# Altium PCB iso_simucam.PcbDoc (part 3 of 4)
Units mil, origin at the board's own origin, x right, y up, seen from the top; angles counter-clockwise.
Board outline 2600 x 5120 mil, 2 copper layers (Top Layer, Bottom Layer); 384 components, 206 nets, 1336 pads, 508 vias.
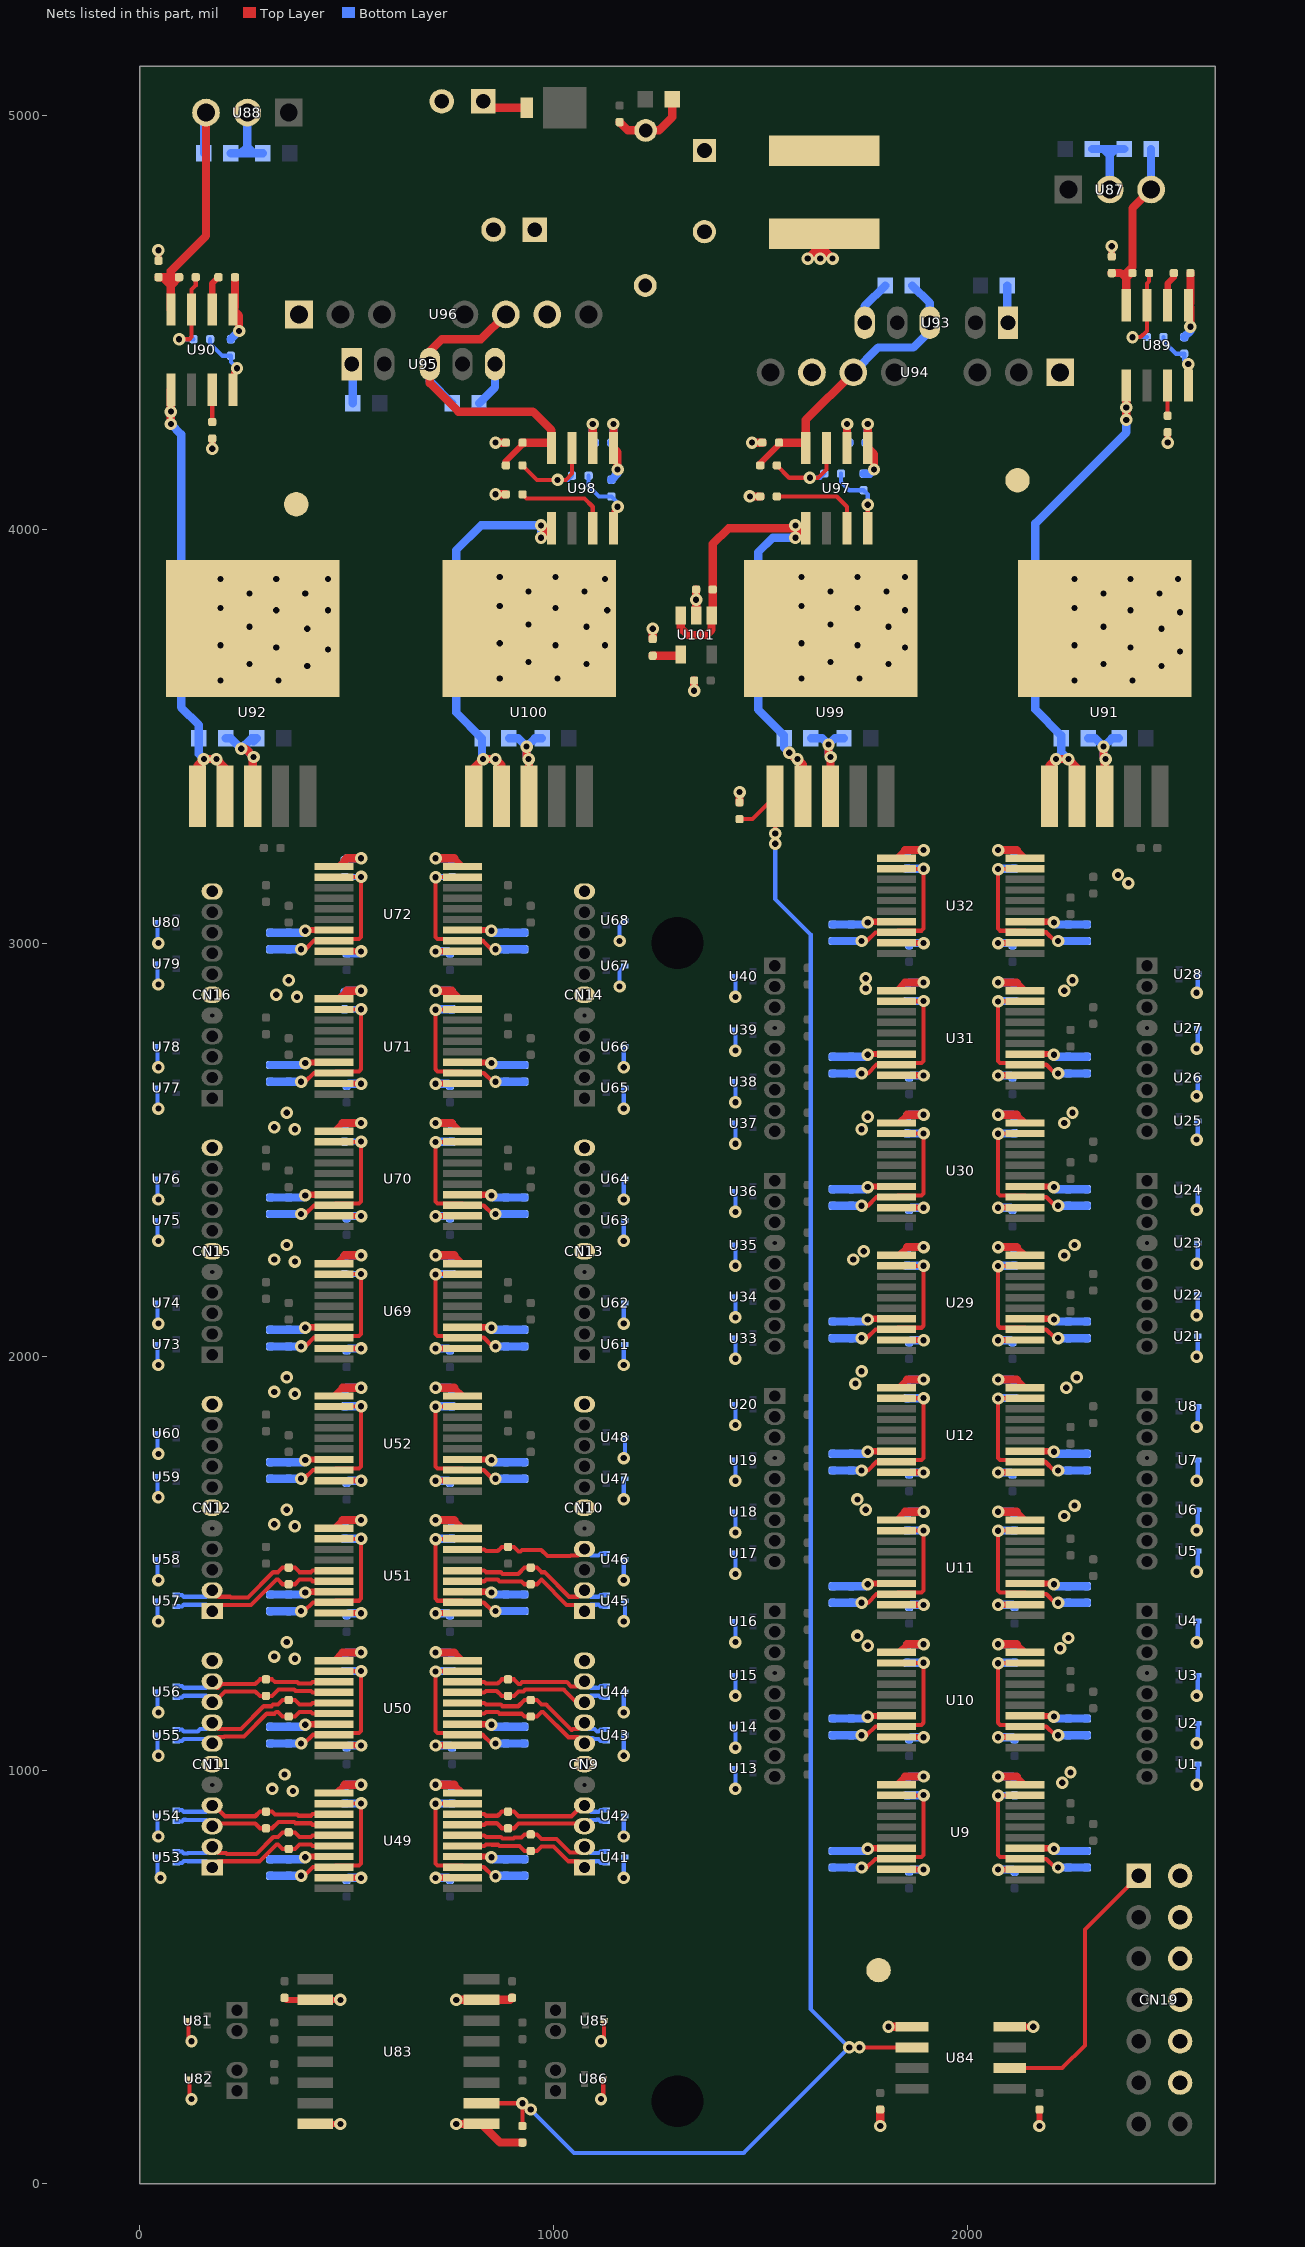
[diagram p3: the nets of this part, all layers, seen from the top]

## Via types
v1: diameter 30, hole 15, Top Layer to Bottom Layer, tented both sides, 508 vias

## Nets (pads, with @x,y where several pads share a name; then routed paths per layer and width w, separated by ;. In a path a pad name is that pad's centre, name@x,y a point inside that pad or via, vN(x,y) a via of type N, cw(c..) or ccw(c..) an arc to the next point about the centre after c; other vN are vias at no path point) (continued)
GND: C1.1 C2.1 C3.1 C4.1 C5.1 C6.1 C7.1 C8.1 C9.2 C10.2 C11.2 C12.2 C13.1 C14.1 C15.1 C16.1 C33.1 C34.1 C35.1 C36.1 C37.1 C38.1 C39.1 C40.1 C41.2 C42.2 C43.2 C44.2 C45.1 C46.1 C47.1 C48.1 C81.1 C82.1 C83.1 C84.1 C85.1 C86.1 C87.1 C88.1 C89.1 C90.1 C91.1 C92.1 C93.1 C94.1 C95.1 C96.1 C113.1 C114.1 C115.1 C116.1 C117.1 C118.1 C119.1 C120.1 C121.1 C122.1 C123.1 C124.1 C125.1 C126.1 C127.1 C128.1 C129.1 C130.2 C133.1 C134.1 C135.1 C136.1 C137.1 C138.1 C139.1 C140.1 C141.1 C142.1 C143.1 C144.1 C145.1 C146.1 C147.1 C148.1 C149.1 C150.1 CN11.6 CN11.11 CN12.6 CN12.11 CN15.6 CN15.11 CN16.6 CN16.11 CN19.2 CN19.4 CN19.6 CN19.8 CN19.10 CN19.12 CN22.2 FD1.0 FD2.0 R74.1 R75.1 R76.1 R77.1 R79.2 U1.3 U2.3 U3.3 U4.3 U5.3 U6.3 U7.3 U8.3 U9.2 U9.4 U9.10 U10.2 U10.4 U10.10 U11.2 U11.4 U11.10 U12.2 U12.4 U12.10 U21.3 U22.3 U23.3 U24.3 U25.3 U26.3 U27.3 U28.3 U29.2 U29.4 U29.10 U30.2 U30.4 U30.10 U31.2 U31.4 U31.10 U32.2 U32.4 U32.10 U49.11 U49.17 U49.19 U50.11 U50.17 U50.19 U51.11 U51.17 U51.19 U52.11 U52.17 U52.19 U53.3 U54.3 U55.3 U56.3 U57.3 U58.3 U59.3 U60.3 U69.11 U69.17 U69.19 U70.11 U70.17 U70.19 U71.11 U71.17 U71.19 U72.11 U72.17 U72.19 U73.3 U74.3 U75.3 U76.3 U77.3 U78.3 U79.3 U80.3 U81.3 U82.3 U83.2 U83.8 U84.4 U87.2 U88.2 U89.1 U90.1 U91.3 U91.6 U92.3 U92.6 U93.1 U94.1 U95.1 U96.1 | length 9818.5
  Top Layer w10: U81.3@117.36,395 117.36,352.64 v1(125,345) ; U82.3@119.72,253.78 119.72,210.28 v1(125,205) ; U72.11@469.49,3185.16 U72.11@480.16,3185.16
  Top Layer w15: C140.1@45,4650.08 v1(45,4675) ; v1(175,4195) R77.1@175,4219.92 ; C129.1@350,449.92 354.92,445 U83.2@424.21,445 v1(485,445) ; v1@395.08,785.08 v1(400,790) 401.61,791.61 U49.17@469.49,791.61 ; v1@395.08,1105.08 v1(400,1110) 401.61,1111.61 U50.17@469.49,1111.61 ; v1@395.08,1425.08 v1(400,1430) 401.61,1431.61 U51.17@469.49,1431.61 ; v1@395.08,1745.08 v1(400,1750) 401.61,1751.61 U52.17@469.49,1751.61 ; v1@395.08,2065.08 v1(400,2070) 401.18,2071.18 U69.17@469.49,2071.18 ; v1@395.08,2385.08 v1(400,2390) 401.61,2391.61 U70.17@469.49,2391.61 ; v1@395.08,2705.08 v1(400,2710) 401.61,2711.61 U71.17@469.49,2711.61 ; v1@395.08,3025.08 v1(400,3030) 401.61,3031.61 U72.17@469.49,3031.61 ; U83.8@424.21,145 v1(485,145) ; U49.19@469.49,740.43 534.57,740.43 v1(535,740) ; U49.11@469.49,945.16 475.16,945.16 495,965 ; U50.19@469.49,1060.43 534.57,1060.43 v1(535,1060) ; U50.11@469.49,1265.16 489.33,1285 490,1285 ; U51.19@469.49,1380.43 534.57,1380.43 v1(535,1380) ; U51.11@469.49,1585.16 489.33,1605 490,1605 ; U52.19@469.49,1700.43 534.57,1700.43 v1(535,1700) ; U52.11@469.49,1905.16 489.33,1925 490,1925 ; U69.19@469.49,2020 v1(535,2020) ; U69.11@469.49,2224.72 474.72,2224.72 495,2245 ; U70.19@469.49,2340.43 534.57,2340.43 v1(535,2340) ; U70.11@469.49,2545.16 489.33,2565 490,2565 ; U71.19@469.49,2660.43 534.57,2660.43 v1(535,2660) ; U71.11@469.49,2865.16 480.16,2865.16 500,2885 ; U72.19@469.49,2980.43 534.57,2980.43 v1(535,2980) ; U72.11@480.16,3185.16 495,3200 ; v1(2075,760) 2075.43,760.43 U9.2@2140.51,760.43 ; v1(2075,1080) 2075.43,1080.43 U10.2@2140.51,1080.43 ; v1(2075,1400) 2075.43,1400.43 U11.2@2140.51,1400.43 ; v1(2075,1720) 2075.43,1720.43 U12.2@2140.51,1720.43 ; v1(2075,2040) 2075.43,2040.43 U29.2@2140.51,2040.43 ; v1(2075,2360) 2075.43,2360.43 U30.2@2140.51,2360.43 ; v1(2075,2680) 2075.43,2680.43 U31.2@2140.51,2680.43 ; v1(2075,3000) 2075.59,3000.59 U32.2@2140.51,3000.59 ; U84.4@2103.11,380 v1(2160,380) ; 2120,985 2139.84,965.16 U9.10@2140.51,965.16 ; 2120,1305 2120.67,1305 U10.10@2140.51,1285.16 ; 2120,1625 2120.67,1625 U11.10@2140.51,1605.16 ; 2120,1945 2120.67,1945 U12.10@2140.51,1925.16 ; 2120,2265 2120.67,2265 U29.10@2140.51,2245.16 ; 2120,2585 2120.67,2585 U30.10@2140.51,2565.16 ; 2120,2905 2120.67,2905 U31.10@2140.51,2885.16 ; 2120,3225 2120,3225.83 U32.10@2140.51,3205.31 ; U9.4@2140.51,811.61 2203.39,811.61 v1@2210,805 ; U10.4@2140.51,1131.61 2203.39,1131.61 v1@2209.92,1125.08 ; U11.4@2140.51,1451.61 2203.39,1451.61 v1@2209.92,1445.08 ; U12.4@2140.51,1771.61 2203.39,1771.61 v1@2209.92,1765.08 ; U29.4@2140.51,2091.61 2203.39,2091.61 v1@2209.92,2085.08 ; U30.4@2140.51,2411.61 2203.39,2411.61 v1@2209.92,2405.08 ; U31.4@2140.51,2731.61 2203.39,2731.61 v1@2209.92,2725.08 ; U32.4@2140.51,3051.77 2203.23,3051.77 v1@2209.92,3045.08 ; v1(2175,140) C130.2@2175,179.92 ; C139.1@2350,4660.08 v1(2350,4685) ; v1(2485,4210) R76.1@2485,4234.92
  Top Layer w20: C138.1@230.08,4610 230.08,4537.08 U90.1@225,4532 240,4517 v1(240,4480) ; v1(245,3470) 255,3470 v1(275,3450) 273,3448 U92.3@273,3354.97 ; 490,1285 v1(535,1285) ; 490,1605 v1(535,1605) ; 490,1925 v1(535,1925) ; 490,2565 v1(535,2565) ; 495,965 v1(535,965) ; 495,2245 v1(535,2245) ; 495,3200 500,3205 v1(535,3205) ; 500,2885 v1(535,2885) ; C142.1@1160,4984.92 1179.92,4965 R79.2@1223,4965 1255,4965 1287.48,4997.48 C141.1@1287.48,5040 ; v1(2075,985) 2120,985 ; v1(2075,1305) 2120,1305 ; v1(2075,1625) 2120,1625 ; v1(2075,1945) 2120,1945 ; v1(2075,2265) 2120,2265 ; v1(2075,2585) 2120,2585 ; v1(2075,2905) 2120,2905 ; v1(2075,3225) 2120,3225 ; v1(2330,3475) 2330,3450 v1(2335,3445) 2333,3443 U91.3@2333,3354.97 ; v1(2540,4490) 2540,4537 U89.1@2535,4542 2540.08,4547.08 C137.1@2540.08,4620
  Bottom Layer w10: U53.3@42.36,790 42.36,747.64 v1(50,740) ; U54.3@42.36,890 42.36,842.64 v1(45,840) ; U55.3@42.36,1085 42.36,1037.64 v1(45,1035) ; U56.3@42.36,1190 42.36,1142.64 v1(45,1140) ; U57.3@42.36,1410 42.36,1362.64 v1(45,1360) ; U58.3@42.36,1510 42.36,1462.64 v1(45,1460) ; U59.3@42.36,1710 42.36,1662.64 v1(45,1660) ; U60.3@42.36,1815 42.36,1767.64 v1(45,1765) ; U73.3@42.36,2030 42.36,1982.64 v1(45,1980) ; U74.3@42.36,2130 42.36,2082.64 v1(45,2080) ; U75.3@42.36,2330 42.36,2282.64 v1(45,2280) ; U76.3@42.36,2430 42.36,2382.64 v1(45,2380) ; U77.3@42.36,2650 42.36,2602.64 v1(45,2600) ; U78.3@42.36,2750 42.36,2702.64 v1(45,2700) ; U79.3@42.36,2950 42.36,2902.64 v1(45,2900) ; U80.3@42.36,3050 42.36,3002.64 v1(45,3000) ; v1(2555,965) 2557.64,967.64 U1.3@2557.64,1015 ; v1(2555,1065) 2557.64,1067.64 U2.3@2557.64,1113.78 ; v1(2555,1180) 2557.64,1182.64 U3.3@2557.64,1230 ; v1(2555,1310) 2557.64,1312.64 U4.3@2557.64,1361.22 ; v1(2555,1480) 2557.64,1482.64 U5.3@2557.64,1530 ; v1(2555,1580) 2557.64,1582.64 U6.3@2557.64,1630 ; v1(2555,1700) 2557.64,1702.64 U7.3@2557.64,1750 ; v1(2555,1830) 2557.64,1832.64 U8.3@2557.64,1880 ; v1(2555,2000) 2557.64,2002.64 U21.3@2557.64,2050 ; v1(2555,2100) 2557.64,2102.64 U22.3@2557.64,2150 ; v1(2555,2225) 2557.64,2227.64 U23.3@2557.64,2275 ; v1(2555,2355) 2557.64,2357.64 U24.3@2557.64,2403.78 ; v1(2555,2525) 2557.64,2527.64 U25.3@2557.64,2570 ; v1(2555,2630) 2557.64,2632.64 U26.3@2557.64,2675 ; v1(2555,2745) 2557.64,2747.64 U27.3@2557.64,2793.78 ; v1(2555,2880) 2557.64,2882.64 U28.3@2557.64,2925
  Bottom Layer w20: C144.1@207.48,3495 220,3495 v1(245,3470) ; C136.1@219.96,4910 245,4910 ; R75.1@220,4460.16 220.16,4460.16 v1(240,4480) ; U88.2@260,5008 260,4925 ; v1(275,3450) 255,3470 v1(245,3470) ; C146.1@275,3487.48 C146.1@282.52,3495 270,3495 v1(245,3470) ; C134.1@297.52,4910 275,4910 ; C93.1@315,785.16 359.92,785.16 C89.1@360,785.08 395.08,785.08 v1(400,790) ; C94.1@315,1105.08 C90.1@360,1105.08 395.08,1105.08 v1(400,1110) ; C95.1@315,1425.08 C91.1@360,1425.08 395.08,1425.08 v1(400,1430) ; C96.1@315,1745.16 359.92,1745.16 C92.1@360,1745.08 395.08,1745.08 v1(400,1750) ; C125.1@315,2065.08 C121.1@360,2065.08 395.08,2065.08 v1(400,2070) ; C126.1@315,2385.16 359.92,2385.16 C122.1@360,2385.08 395.08,2385.08 v1(400,2390) ; C127.1@315,2705.08 C123.1@360,2705.08 395.08,2705.08 v1(400,2710) ; C128.1@315,3025.08 C124.1@360,3025.08 395.08,3025.08 v1(400,3030) ; C85.1@495,960.08 499.92,965 v1(535,965) ; C86.1@495,1280.08 499.92,1285 v1(535,1285) ; C87.1@495,1600.16 499.84,1605 v1(535,1605) ; C88.1@495,1920.16 499.84,1925 v1(535,1925) ; C117.1@495,2240.08 499.92,2245 v1(535,2245) ; C118.1@495,2560.16 499.84,2565 v1(535,2565) ; C119.1@495,2880 500,2885 v1(535,2885) ; C120.1@495,3200.08 499.92,3205 v1(535,3205) ; C81.1@500,735.08 504.92,740 v1(535,740) ; C82.1@500,1055.08 504.92,1060 v1(535,1060) ; C83.1@500,1375.08 504.92,1380 v1(535,1380) ; C84.1@500,1695.16 504.84,1700 v1(535,1700) ; C113.1@500,2015.08 504.92,2020 v1(535,2020) ; C114.1@500,2335.08 504.92,2340 v1(535,2340) ; C115.1@500,2655.16 504.84,2660 v1(535,2660) ; C116.1@500,2975.08 530.08,2975.08 v1(535,2980) ; U95.1@512.28,4400 515.04,4397.24 C150.1@515.04,4305 ; v1(2075,760) 2110.08,760 C9.2@2115,755.08 ; v1(2075,985) 2110,985 C13.1@2115,980 ; v1(2075,1080) 2110,1080 C10.2@2115,1075 ; v1(2075,1305) 2110.08,1305 C14.1@2115,1300.08 ; v1(2075,1400) 2110,1400 C11.2@2115,1395 ; v1(2075,1625) 2110.08,1625 C15.1@2115,1620.08 ; v1(2075,1720) 2105,1720 C12.2@2110,1715 ; v1(2075,1945) 2110.16,1945 C16.1@2115,1940.16 ; v1(2075,2040) 2105.08,2040 C41.2@2110,2035.08 ; v1(2075,2265) 2110.08,2265 C45.1@2115,2260.08 ; v1(2075,2360) 2105.08,2360 C42.2@2110,2355.08 ; v1(2075,2585) 2110.08,2585 C46.1@2115,2580.08 ; v1(2075,2680) 2105.08,2680 C43.2@2110,2675.08 ; v1(2075,2905) 2110.08,2905 C47.1@2115,2900.08 ; v1(2075,3000) 2105.08,3000 C44.2@2110,2995.08 ; v1(2075,3225) 2110.08,3225 C48.1@2115,3220.08 ; C149.1@2097.48,4590 2097.48,4501.5 U93.1@2098.98,4500 ; v1(2210,810) 2215,805 C5.1@2245,805 2245.08,805.08 C1.1@2290,805.08 ; v1(2210,1130) 2214.92,1125.08 C6.1@2245,1125.08 2245.08,1125.16 C2.1@2290,1125.16 ; v1(2210,1450) 2214.92,1445.08 C7.1@2245,1445.08 C3.1@2290,1445.08 ; v1(2210,1770) 2214.92,1765.08 C8.1@2245,1765.08 C4.1@2290,1765.08 ; v1(2210,2090) 2214.92,2085.08 C37.1@2245,2085.08 C33.1@2290,2085.08 ; v1(2210,2410) 2214.92,2405.08 C38.1@2245,2405.08 C34.1@2290,2405.08 ; v1(2210,2730) 2214.92,2725.08 C39.1@2245,2725.08 C35.1@2290,2725.08 ; v1(2210,3050) 2214.92,3045.08 C40.1@2245,3045.08 C36.1@2290,3045.08 ; C143.1@2292.48,3495 2310,3495 v1(2330,3475) ; C133.1@2302.48,4920 2330,4920 ; v1(2335,3445) 2330,3450 v1(2330,3475) ; U87.2@2345,4822 2345,4905 ; C145.1@2367.52,3495 2350,3495 v1(2330,3475) ; C135.1@2380,4920 2360,4920 ; R74.1@2525,4465.08 2540,4480.08 v1(2540,4490) ; 245,4910 260,4925 ; 245,4910 275,4910 ; 260,4925 275,4910 ; 2330,4920 2345,4905 ; 2330,4920 2360,4920 ; 2345,4905 2360,4920
  other v1: 370,950 320,955 2230,970 350,990 2250,995 375,1270 325,1275 2225,1295 355,1310 2245,1320 375,1590 325,1595 2235,1615 355,1630 2260,1640 375,1910 325,1915 2240,1925 355,1950 2265,1950 375,2230 325,2235 2235,2245 355,2270 2260,2270 375,2550 325,2555 2235,2565 355,2590 2255,2590 380,2870 330,2875 2235,2885 360,2910 2255,2910 2390,3145 2365,3165 195,3635 335,3635 2260,3635 2400,3635 405,3670 2470,3670 265,3675 2330,3675 2515,3705 455,3710 330,3715 2395,3715 195,3720 2260,3720 405,3760 2470,3760 265,3765 2330,3765 2515,3800 330,3805 455,3805 2395,3805 195,3810 2260,3810 265,3845 400,3845 2330,3845 2465,3845 195,3880 330,3880 455,3880 2260,3880 2395,3880 2510,3880
GND_ISO: C17.1 C18.1 C19.1 C20.1 C21.1 C22.1 C23.1 C24.1 C25.1 C26.1 C27.1 C28.1 C29.1 C30.1 C31.1 C32.1 C49.1 C50.1 C51.1 C52.1 C53.1 C54.1 C55.1 C56.1 C57.1 C58.1 C59.1 C60.1 C61.1 C62.1 C63.1 C64.1 C65.1 C66.1 C67.1 C68.1 C69.1 C70.1 C71.1 C72.1 C73.2 C74.2 C75.2 C76.2 C77.1 C78.1 C79.1 C80.1 C97.1 C98.1 C99.1 C100.1 C101.1 C102.1 C103.1 C104.1 C105.2 C106.2 C107.2 C108.2 C109.1 C110.1 C111.1 C112.1 C131.2 C132.1 C147.2 C148.2 C151.1 C152.1 C153.1 C154.1 C155.1 C156.1 C157.1 C158.1 C159.1 C160.1 C161.1 C162.1 C163.1 CN9.6 CN9.11 CN10.6 CN10.11 CN13.6 CN13.11 CN14.6 CN14.11 CN23.1 CN23.2 FD3.0 R67.1 R79.1 R84.1 R85.1 R86.1 R87.1 R88.2 U9.11 U9.17 U9.19 U10.11 U10.17 U10.19 U11.11 U11.17 U11.19 U12.11 U12.17 U12.19 U13.3 U14.3 U15.3 U16.3 U17.3 U18.3 U19.3 U20.3 U29.11 U29.17 U29.19 U30.11 U30.17 U30.19 U31.11 U31.17 U31.19 U32.11 U32.17 U32.19 U33.3 U34.3 U35.3 U36.3 U37.3 U38.3 U39.3 U40.3 U41.3 U42.3 U43.3 U44.3 U45.3 U46.3 U47.3 U48.3 U49.2 U49.4 U49.10 U50.2 U50.4 U50.10 U51.2 U51.4 U51.10 U52.2 U52.4 U52.10 U61.3 U62.3 U63.3 U64.3 U65.3 U66.3 U67.3 U68.3 U69.2 U69.4 U69.10 U70.2 U70.4 U70.10 U71.2 U71.4 U71.10 U72.2 U72.4 U72.10 U83.9 U83.15 U84.5 U85.3 U86.3 U93.5 U94.7 U95.5 U96.7 U97.1 U98.1 U99.3 U99.6 U100.3 U100.6 U101.2 | length 9741.3
  Top Layer w10: v1(1115,205) 1120.28,210.28 U86.3@1120.28,253.78 ; v1(1115,345) 1122.64,352.64 U85.3@1122.64,395
  Top Layer w15: v1(715,740) 715.43,740.43 U49.2@780.51,740.43 ; v1(715,1060) 715.43,1060.43 U50.2@780.51,1060.43 ; v1(715,1380) 715.43,1380.43 U51.2@780.51,1380.43 ; v1(715,1700) 715.43,1700.43 U52.2@780.51,1700.43 ; v1(715,2020) U69.2@780.51,2020 ; v1(715,2340) 715.43,2340.43 U70.2@780.51,2340.43 ; v1(715,2660) 715.43,2660.43 U71.2@780.51,2660.43 ; v1(715,2980) 715.43,2980.43 U72.2@780.51,2980.43 ; 755,2565 774.84,2545.16 U70.10@780.51,2545.16 ; 755,2885 774.84,2865.16 U71.10@780.51,2865.16 ; 760,965 760.67,965 U49.10@780.51,945.16 ; 760,1285 760.67,1285 U50.10@780.51,1265.16 ; 760,1605 760.67,1605 U51.10@780.51,1585.16 ; 760,1925 760.67,1925 U52.10@780.51,1905.16 ; 760,2245 760.24,2245 U69.10@780.51,2224.72 ; 760,3205 760.67,3205 U72.10@780.51,3185.16 ; U49.4@780.51,791.61 v1@843.39,791.61 ; U50.4@780.51,1111.61 v1@843.39,1111.61 ; U51.4@780.51,1431.61 v1@843.39,1431.61 ; U52.4@780.51,1751.61 v1@843.39,1751.61 ; U69.4@780.51,2071.18 v1@843.82,2071.18 ; U70.4@780.51,2391.61 v1@843.39,2391.61 ; U71.4@780.51,2711.61 v1@843.39,2711.61 ; U72.4@780.51,3031.61 v1@843.39,3031.61 ; v1@845,790 849.53,791.46 v1@850,791.61 ; v1@845,1110 849.53,1111.46 v1@850,1111.61 ; v1@845,1430 849.53,1431.46 v1@850,1431.61 ; v1@845,1750 849.53,1751.46 v1@850,1751.61 ; v1@845,2070 849.74,2071.12 v1@850,2071.18 ; v1@845,2390 849.53,2391.46 v1@850,2391.61 ; v1@845,2710 849.53,2711.46 v1@850,2711.61 ; v1@849.84,1425.16 v1(850,1430) ; v1@849.92,785.08 v1(850,790) ; v1@849.92,1105.08 v1(850,1110) ; v1@849.92,1745.08 v1(850,1750) ; v1@849.92,2065.08 v1(850,2070) ; v1@849.92,2385.08 v1(850,2390) ; v1@849.92,2705.08 v1(850,2710) ; v1@849.92,3025.08 v1(850,3030) v1@850,3031.61 ; v1@1755,1445 v1(1760,1450) 1761.61,1451.61 U11.17@1829.49,1451.61 ; v1@1755.08,805.08 v1(1760,810) 1761.61,811.61 U9.17@1829.49,811.61 ; v1@1755.08,1125.08 v1(1760,1130) 1761.61,1131.61 U10.17@1829.49,1131.61 ; v1@1755.08,1765.08 v1(1760,1770) 1761.61,1771.61 U12.17@1829.49,1771.61 ; v1@1755.08,2085.08 v1(1760,2090) 1761.61,2091.61 U29.17@1829.49,2091.61 ; v1@1755.08,2725.08 v1(1760,2730) 1761.61,2731.61 U31.17@1829.49,2731.61 ; v1@1755.08,3045.08 v1(1760,3050) 1761.77,3051.77 U32.17@1829.49,3051.77 ; v1@1755.16,2405.16 v1(1760,2410) 1761.61,2411.61 U30.17@1829.49,2411.61 ; U9.19@1829.49,760.43 1894.57,760.43 v1(1895,760) ; U9.11@1829.49,965.16 1830.16,965.16 1850,985 ; U10.19@1829.49,1080.43 1894.57,1080.43 v1(1895,1080) ; U10.11@1829.49,1285.16 1835.16,1285.16 1855,1305 ; U11.19@1829.49,1400.43 1894.57,1400.43 v1(1895,1400) ; U11.11@1829.49,1605.16 1849.33,1625 1850,1625 ; U12.19@1829.49,1720.43 1894.57,1720.43 v1(1895,1720) ; U12.11@1829.49,1925.16 1835.16,1925.16 1855,1945 ; U29.19@1829.49,2040.43 1894.57,2040.43 v1(1895,2040) ; U29.11@1829.49,2245.16 1835.16,2245.16 1855,2265 ; U30.19@1829.49,2360.43 1894.57,2360.43 v1(1895,2360) ; U30.11@1829.49,2565.16 1835.16,2565.16 1855,2585 ; U31.19@1829.49,2680.43 1894.57,2680.43 v1(1895,2680) ; U31.11@1829.49,2885.16 1830.16,2885.16 1850,2905 ; U32.19@1829.49,3000.59 1894.41,3000.59 v1(1895,3000) ; U32.11@1829.49,3205.31 1849.17,3225 1850,3225
  Top Layer w20: v1(715,965) 760,965 ; v1(715,1285) 760,1285 ; v1(715,1605) 760,1605 ; v1(715,1925) 760,1925 ; v1(715,2245) 760,2245 ; v1(715,2565) 755,2565 ; v1(715,2885) 755,2885 ; v1(715,3205) 760,3205 ; v1(765,145) U83.9@825.79,145 870.87,99.92 R67.1@925,99.92 ; v1(765,445) U83.15@825.79,445 895.16,445 C131.2@900,449.84 ; v1(860,4085) R87.1@884.92,4085 ; v1(860,4210) C156.1@884.92,4210 ; v1(935,3475) 935,3450 v1(940,3445) 941.14,3443.86 U100.3@941.14,3354.97 ; v1(1145,4255) U98.1@1145,4197 1155,4187 v1(1155,4145) ; C160.1@1240,3735.08 v1(1240,3760) ; v1(1340,3610) C163.1@1340,3635 ; C159.1@1344.92,3855 1344.92,3830.08 v1(1345,3830) U101.2@1345,3792.24 ; R88.2@1450,3340.08 v1(1450,3365) ; v1(1475,4080) R86.1@1499.92,4080 ; v1(1480,4210) C155.1@1505,4210 ; v1(1615,4655) C148.2@1645,4685 ; v1(1645,4655) C148.2@1645,4685 ; v1(1665,3480) 1665,3455 v1(1670,3450) U99.3@1670,3354.97 ; v1(1675,4655) C148.2@1645,4685 ; v1(1760,4255) U97.1@1760,4197 1775,4182 v1(1775,4145) ; v1(1790,140) C132.1@1790,179.92 ; v1(1810,380) U84.5@1866.89,380 ; 1850,985 v1(1895,985) ; 1850,1625 v1(1895,1625) ; 1850,2905 v1(1895,2905) ; 1850,3225 v1(1895,3225) ; 1855,1305 v1(1895,1305) ; 1855,1945 v1(1895,1945) ; 1855,2265 v1(1895,2265) ; 1855,2585 v1(1895,2585) ; C148.2@1645,4685 1645,4705 C148.2@1655,4715 1655,4695 C148.2@1645,4685
  Bottom Layer w10: v1(1160,2895) 1160,2932.36 U67.3@1172.64,2945 ; v1(1160,3005) 1160,3042.36 U68.3@1172.64,3055 ; v1(1170,740) 1170,787.36 U41.3@1172.64,790 ; v1(1170,840) 1170,887.36 U42.3@1172.64,890 ; v1(1170,1035) 1170,1082.36 U43.3@1172.64,1085 ; v1(1170,1140) 1170,1187.36 U44.3@1172.64,1190 ; v1(1170,1360) 1172.64,1362.64 U45.3@1172.64,1410 ; v1(1170,1460) 1170,1507.36 U46.3@1172.64,1510 ; v1(1170,1655) 1170,1702.36 U47.3@1172.64,1705 ; v1(1170,1755) 1172.64,1757.64 U48.3@1172.64,1805 ; v1(1170,1980) 1170,2027.36 U61.3@1172.64,2030 ; v1(1170,2080) 1170,2127.36 U62.3@1172.64,2130 ; v1(1170,2280) 1170,2327.36 U63.3@1172.64,2330 ; v1(1170,2380) 1170,2427.36 U64.3@1172.64,2430 ; v1(1170,2600) 1170,2647.36 U65.3@1172.64,2650 ; v1(1170,2700) 1170,2747.36 U66.3@1172.64,2750 ; U13.3@1437.36,1005 1440,1002.36 v1(1440,955) ; U14.3@1437.36,1105 1440,1102.36 v1(1440,1055) ; U15.3@1437.36,1230 1440,1227.36 v1(1440,1180) ; U16.3@1437.36,1360 1440,1357.36 v1(1440,1310) ; U17.3@1437.36,1525 1440,1522.36 v1(1440,1475) ; U18.3@1437.36,1625 1440,1622.36 v1(1440,1575) ; U19.3@1437.36,1750 1440,1747.36 v1(1440,1700) ; U20.3@1437.36,1885 1440,1882.36 v1(1440,1835) ; U33.3@1437.36,2045 1440,2042.36 v1(1440,1995) ; U34.3@1437.36,2145 1440,2142.36 v1(1440,2095) ; U35.3@1437.36,2270 1440,2267.36 v1(1440,2220) ; U36.3@1437.36,2400 1440,2397.36 v1(1440,2350) ; U37.3@1437.36,2565 1440,2562.36 v1(1440,2515) ; U38.3@1437.36,2665 1440,2662.36 v1(1440,2615) ; U39.3@1437.36,2790 1440,2787.36 v1(1440,2740) ; U40.3@1437.36,2920 1440,2917.36 v1(1440,2870)
  Bottom Layer w20: v1(715,740) 745.16,740 C73.2@750,735.16 ; v1(715,965) 750.08,965 C77.1@755,960.08 ; v1(715,1060) 750.16,1060 C74.2@755,1055.16 ; v1(715,1285) 750.16,1285 C78.1@755,1280.16 ; v1(715,1380) 745.08,1380 C75.2@750,1375.08 ; v1(715,1605) 750.08,1605 C79.1@755,1600.08 ; v1(715,1700) 745.08,1700 C76.2@750,1695.08 ; v1(715,1925) 750.08,1925 C80.1@755,1920.08 ; v1(715,2020) 745.08,2020 C105.2@750,2015.08 ; v1(715,2245) 750.08,2245 C109.1@755,2240.08 ; v1(715,2340) 745.08,2340 C106.2@750,2335.08 ; v1(715,2565) 750.08,2565 C110.1@755,2560.08 ; v1(715,2660) 745.16,2660 C107.2@750,2655.16 ; v1(715,2885) 750.16,2885 C111.1@755,2880.16 ; v1(715,2980) 745.08,2980 C108.2@750,2975.08 ; v1(715,3205) 750.08,3205 C112.1@755,3200.08 ; C152.1@820,4305 858.74,4343.74 U95.5@858.74,4400 ; v1(850,790) 854.92,785.08 C69.1@885,785.08 C65.1@930,785.08 ; v1(850,1110) 854.92,1105.08 C70.1@885,1105.08 C66.1@930,1105.08 ; v1(850,1430) 854.84,1425.16 C71.1@885,1425.16 C67.1@930,1425.16 ; v1(850,1750) 854.92,1745.08 C72.1@885,1745.08 C68.1@930,1745.08 ; v1(850,2070) 854.92,2065.08 C101.1@885,2065.08 C97.1@930,2065.08 ; v1(850,2390) 854.92,2385.08 C102.1@885,2385.08 885.08,2385.16 C98.1@930,2385.16 ; v1(850,2710) 854.92,2705.08 C103.1@885,2705.08 C99.1@930,2705.08 ; v1(850,3030) 854.92,3025.08 C104.1@885,3025.08 C100.1@930,3025.08 ; C158.1@892.48,3495 915,3495 v1(935,3475) ; v1(940,3445) 935,3450 v1(935,3475) ; C162.1@972.52,3495 955,3495 v1(935,3475) ; R85.1@1140,4120.08 1155,4135.08 v1(1155,4145) ; C154.1@1140.08,4210 1145,4214.92 v1(1145,4255) ; C157.1@1622.48,3495 1650,3495 v1(1665,3480) ; v1(1670,3450) 1665,3455 v1(1665,3480) ; C29.1@1675,805.08 C25.1@1720,805.08 1755.08,805.08 v1(1760,810) ; C30.1@1675,1125.08 C26.1@1720,1125.08 1755.08,1125.08 v1(1760,1130) ; C31.1@1675,1445 C27.1@1720,1445 1755,1445 v1(1760,1450) ; C32.1@1675,1765.08 C28.1@1720,1765.08 1755.08,1765.08 v1(1760,1770) ; C61.1@1675,2085.08 C57.1@1720,2085.08 1755.08,2085.08 v1(1760,2090) ; C62.1@1675,2405.16 C58.1@1720,2405.16 1755.16,2405.16 v1(1760,2410) ; C63.1@1675,2725.08 C59.1@1720,2725.08 1755.08,2725.08 v1(1760,2730) ; C64.1@1675,3045.08 C60.1@1720,3045.08 1755.08,3045.08 v1(1760,3050) ; C161.1@1702.52,3495 1680,3495 v1(1665,3480) ; R84.1@1750,4135.08 1765.08,4135.08 v1(1775,4145) ; U93.5@1752.52,4500 1752.52,4540 C151.1@1802.52,4590 ; C153.1@1755.08,4210 1760,4214.92 v1(1760,4255) ; C21.1@1855,979.72 1860.28,985 v1(1895,985) ; C22.1@1855,1300.08 1859.92,1305 v1(1895,1305) ; C23.1@1855,1620.16 1859.84,1625 v1(1895,1625) ; C24.1@1855,1940 1860,1945 v1(1895,1945) ; C53.1@1855,2260.16 1859.84,2265 v1(1895,2265) ; C54.1@1855,2580.08 1859.92,2585 v1(1895,2585) ; C55.1@1855,2900.08 1859.92,2905 v1(1895,2905) ; C56.1@1855,3220.08 1859.92,3225 v1(1895,3225) ; C17.1@1860,755.16 1864.84,760 v1(1895,760) ; C18.1@1860,1075.08 1864.92,1080 v1(1895,1080) ; C19.1@1860,1395.08 1864.92,1400 v1(1895,1400) ; C20.1@1860,1715 1865,1720 v1(1895,1720) ; C49.1@1860,2035.08 1864.92,2040 v1(1895,2040) ; C50.1@1860,2355.08 1864.92,2360 v1(1895,2360) ; C51.1@1860,2675.08 1864.92,2680 v1(1895,2680) ; C52.1@1860,2995.08 1864.92,3000 v1(1895,3000)
  other v1: 1760,1301 1735,1325 1755,1630 1735,1655 1730,1935 1745,1965 1725,2235 1750,2255 1745,2550 1760,2580 1755,2890 1755,2915 870,3640 1010,3640 1600,3640 1740,3640 1080,3675 1810,3675 940,3680 1670,3680 1850,3715 1005,3720 1125,3720 1735,3720 870,3725 1600,3725 1080,3765 1810,3765 940,3770 1670,3770 1130,3805 1850,3805 1005,3810 1735,3810 870,3815 1600,3815 940,3850 1075,3850 1670,3850 1805,3850 1125,3880 870,3885 1005,3885 1600,3885 1735,3885 1850,3885
NetC1_2: C1.2 C5.2 C13.2 U9.3 U9.9 | length 470.4
  Top Layer w10: U9.9@2140.51,939.57 2079.57,939.57 2075,935 2075,795 2080,790 2140.51,790 U9.3@2140.51,786.02 2191.55,786.02 v1@2212.73,764.84
  Bottom Layer w15: v1(2075,939) 2075.84,939.84 C13.2@2115,939.84
  Bottom Layer w20: v1(2220,765) 2220.16,764.84 C5.2@2245,764.84 2245.08,764.92 C1.2@2290,764.92
NetC2_2: C2.2 C6.2 C14.2 U10.3 U10.9 | length 470.3
  Top Layer w10: U10.9@2140.51,1259.57 2079.57,1259.57 2075,1255 2075,1115 2080,1110 2140.51,1110 U10.3@2140.51,1106.02 2191.55,1106.02 v1@2212.65,1084.92
  Bottom Layer w20: v1(2075,1259) 2075.92,1259.92 C14.2@2115,1259.92 ; v1(2220,1085) 2220.08,1084.92 C6.2@2245,1084.92 2245.08,1085 C2.2@2290,1085
NetC3_2: C3.2 C7.2 C15.2 U11.3 U11.9 | length 470.3
  Top Layer w10: U11.9@2140.51,1579.57 2079.57,1579.57 2075,1575 2075,1435 2080,1430 2140.51,1430 U11.3@2140.51,1426.02 2191.55,1426.02 v1@2212.65,1404.92
  Bottom Layer w20: v1(2075,1579) 2075.92,1579.92 C15.2@2115,1579.92 ; v1(2220,1405) 2220.08,1404.92 C7.2@2245,1404.92 C3.2@2290,1404.92
NetC4_2: C4.2 C8.2 C16.2 U12.3 U12.9 | length 467.7
  Top Layer w10: U12.9@2140.51,1899.57 2079.57,1899.57 2075,1895 2075,1755 2080,1750 2140.51,1750 U12.3@2140.51,1746.02 2188.98,1746.02 v1@2210.08,1724.92
  Bottom Layer w20: v1(2075,1899) 2076,1900 C16.2@2115,1900 ; v1(2220,1725) 2220.08,1724.92 C8.2@2245,1724.92 C4.2@2290,1724.92
NetC21_2: C21.2 C25.2 C29.2 U9.12 U9.18 | length 471
  Top Layer w10: v1@1757.35,764.92 1778.45,786.02 U9.18@1829.49,786.02 1833.46,790 1890,790 1895,795 v1(1895,940) 1894.57,939.57 U9.12@1829.49,939.57
  Bottom Layer w20: C29.2@1675,764.92 C25.2@1720,764.92 1744.92,764.92 v1(1745,765) ; C21.2@1855,939.57 1894.57,939.57 v1(1895,940)
NetC22_2: C22.2 C26.2 C30.2 U10.12 U10.18 | length 470.9
  Top Layer w10: v1@1757.35,1084.92 1778.45,1106.02 U10.18@1829.49,1106.02 1833.46,1110 1890,1110 1895,1115 v1(1895,1260) 1894.57,1259.57 U10.12@1829.49,1259.57
  Bottom Layer w20: C30.2@1675,1084.92 C26.2@1720,1084.92 1744.92,1084.92 v1(1745,1085) ; C22.2@1855,1259.92 1894.92,1259.92 v1(1895,1260)
NetC23_2: C23.2 C27.2 C31.2 U11.12 U11.18 | length 483.2
  Top Layer w10: v1(1745,1405) 1760,1405 1781.02,1426.02 U11.18@1829.49,1426.02 1833.46,1430 1890,1430 1895,1435 v1(1895,1580) 1894.57,1579.57 U11.12@1829.49,1579.57
  Bottom Layer w20: C31.2@1675,1404.84 C27.2@1720,1404.84 1744.84,1404.84 v1(1745,1405) ; C23.2@1855,1580 v1(1895,1580)
NetC24_2: C24.2 C28.2 C32.2 U12.12 U12.18 | length 483.2
  Top Layer w10: v1(1745,1725) 1760,1725 1781.02,1746.02 U12.18@1829.49,1746.02 1833.46,1750 1890,1750 1895,1755 v1(1895,1900) 1894.57,1899.57 U12.12@1829.49,1899.57
  Bottom Layer w20: C32.2@1675,1724.92 C28.2@1720,1724.92 1744.92,1724.92 v1(1745,1725) ; C24.2@1855,1899.84 1894.84,1899.84 v1(1895,1900)
NetC33_2: C33.2 C37.2 C45.2 U29.3 U29.9 | length 470.3
  Top Layer w10: U29.9@2140.51,2219.57 2079.57,2219.57 2075,2215 2075,2075 2080,2070 2140.51,2070 U29.3@2140.51,2066.02 2191.55,2066.02 v1@2212.65,2044.92
  Bottom Layer w20: v1(2075,2219) 2075.92,2219.92 C45.2@2115,2219.92 ; v1(2220,2045) 2220.08,2044.92 C37.2@2245,2044.92 C33.2@2290,2044.92
NetC34_2: C34.2 C38.2 C46.2 U30.3 U30.9 | length 470.3
  Top Layer w10: U30.9@2140.51,2539.57 2079.57,2539.57 2075,2535 2075,2395 2080,2390 2140.51,2390 U30.3@2140.51,2386.02 2191.55,2386.02 v1@2212.65,2364.92
  Bottom Layer w20: v1(2075,2539) 2075.92,2539.92 C46.2@2115,2539.92 ; v1(2220,2365) 2220.08,2364.92 C38.2@2245,2364.92 C34.2@2290,2364.92
NetC35_2: C35.2 C39.2 C47.2 U31.3 U31.9 | length 470.3
  Top Layer w10: U31.9@2140.51,2859.57 2079.57,2859.57 2075,2855 2075,2715 2080,2710 2140.51,2710 U31.3@2140.51,2706.02 2191.55,2706.02 v1@2212.65,2684.92
  Bottom Layer w20: v1(2075,2859) 2075.92,2859.92 C47.2@2115,2859.92 ; v1(2220,2685) 2220.08,2684.92 C39.2@2245,2684.92 C35.2@2290,2684.92
NetC36_2: C36.2 C40.2 C48.2 U32.3 U32.9 | length 470.3
  Top Layer w10: U32.3@2140.51,3026.02 U32.3@2140.51,3026.18 ; U32.9@2140.51,3179.57 2079.57,3179.57 2075,3175 2075,3035 2080,3030 2140.51,3030 U32.3@2140.51,3026.18 ; v1@2212.65,3004.92 2191.39,3026.18 U32.3@2140.51,3026.18
  Bottom Layer w20: v1(2075,3179) 2075.92,3179.92 C48.2@2115,3179.92 ; v1(2220,3005) 2220.08,3004.92 C40.2@2245,3004.92 C36.2@2290,3004.92
NetC53_2: C53.2 C57.2 C61.2 U29.12 U29.18 | length 483.2
  Top Layer w10: v1(1745,2045) 1757.43,2045 1778.45,2066.02 U29.18@1829.49,2066.02 1833.46,2070 1890,2070 1895,2075 v1(1895,2220) 1894.57,2219.57 U29.12@1829.49,2219.57
  Bottom Layer w20: C61.2@1675,2044.92 C57.2@1720,2044.92 1744.92,2044.92 v1(1745,2045) ; C53.2@1855,2220 v1(1895,2220)
NetC54_2: C54.2 C58.2 C62.2 U30.12 U30.18 | length 483.2
  Top Layer w10: v1(1745,2365) 1760,2365 1781.02,2386.02 U30.18@1829.49,2386.02 1833.46,2390 1890,2390 1895,2395 v1(1895,2540) 1894.57,2539.57 U30.12@1829.49,2539.57
  Bottom Layer w20: C62.2@1675,2365 C58.2@1720,2365 v1(1745,2365) ; C54.2@1855,2539.92 1894.92,2539.92 v1(1895,2540)
NetC55_2: C55.2 C59.2 C63.2 U31.12 U31.18 | length 483.2
  Top Layer w10: v1(1745,2685) 1760,2685 1781.02,2706.02 U31.18@1829.49,2706.02 1833.46,2710 1890,2710 1895,2715 v1(1895,2860) 1894.57,2859.57 U31.12@1829.49,2859.57
  Bottom Layer w20: C63.2@1675,2684.92 C59.2@1720,2684.92 1744.92,2684.92 v1(1745,2685) ; C55.2@1855,2859.92 1894.92,2859.92 v1(1895,2860)
NetC56_2: C56.2 C60.2 C64.2 U32.12 U32.18 | length 483.2
  Top Layer w10: v1(1745,3005) 1757.43,3005 1778.45,3026.02 1829.49,3026.02 1833.46,3030 1890,3030 1895,3035 v1(1895,3180) 1894.57,3179.57 U32.12@1829.49,3179.57
  Bottom Layer w20: C64.2@1675,3004.92 C60.2@1720,3004.92 1744.92,3004.92 v1(1745,3005) ; C56.2@1855,3179.92 1894.92,3179.92 v1(1895,3180)
NetC65_2: C65.2 C69.2 C77.2 U49.3 U49.9 | length 478.3
  Top Layer w10: U49.9@780.51,919.57 719.57,919.57 715,915 715,775 720,770 780.51,770 U49.3@780.51,766.02 831.55,766.02 853.57,744 v1(860,744)
  Bottom Layer w20: v1(715,919) 715.92,919.92 C77.2@755,919.92 ; v1(860,744) 860.92,744.92 C69.2@885,744.92 C65.2@930,744.92
NetC66_2: C66.2 C70.2 C78.2 U50.3 U50.9 | length 467.7
  Top Layer w10: U50.9@780.51,1239.57 719.57,1239.57 715,1235 715,1095 720,1090 780.51,1090 U50.3@780.51,1086.02 828.98,1086.02 v1@850.08,1064.92
  Bottom Layer w20: v1(715,1239) 716,1240 C78.2@755,1240 ; v1(860,1065) 860.08,1064.92 C70.2@885,1064.92 C66.2@930,1064.92
NetC67_2: C67.2 C71.2 C79.2 U51.3 U51.9 | length 470.1
  Top Layer w10: U51.9@780.51,1559.57 719.57,1559.57 715,1555 715,1415 720,1410 780.51,1410 U51.3@780.51,1406.02 831.55,1406.02 v1@852.57,1385
  Bottom Layer w20: v1(715,1559) 715.92,1559.92 C79.2@755,1559.92 ; v1(860,1385) C71.2@885,1385 C67.2@930,1385
NetC68_2: C68.2 C72.2 C80.2 U52.3 U52.9 | length 470.3
  Top Layer w10: U52.9@780.51,1879.57 719.57,1879.57 715,1875 715,1735 720,1730 780.51,1730 U52.3@780.51,1726.02 831.55,1726.02 v1@852.65,1704.92
  Bottom Layer w20: v1(715,1879) 715.92,1879.92 C80.2@755,1879.92 ; v1(860,1705) 860.08,1704.92 C72.2@885,1704.92 C68.2@930,1704.92
NetC85_2: C85.2 C89.2 C93.2 U49.12 U49.18 | length 475.9
  Top Layer w10: v1@397.35,744.92 418.45,766.02 U49.18@469.49,766.02 473.46,770 530,770 535,775 v1(535,920) 534.57,919.57 U49.12@469.49,919.57
  Bottom Layer w20: C93.2@315,745 359.92,745 C89.2@360,744.92 389.92,744.92 v1(390,745) ; C85.2@495,919.92 534.92,919.92 v1(535,920)
NetC86_2: C86.2 C90.2 C94.2 U50.12 U50.18 | length 475.9
  Top Layer w10: v1@397.35,1064.92 418.45,1086.02 U50.18@469.49,1086.02 473.46,1090 530,1090 535,1095 v1(535,1240) 534.57,1239.57 U50.12@469.49,1239.57
  Bottom Layer w20: C94.2@315,1064.92 C90.2@360,1064.92 389.92,1064.92 v1(390,1065) ; C86.2@495,1239.92 534.92,1239.92 v1(535,1240)
NetC87_2: C87.2 C91.2 C95.2 U51.12 U51.18 | length 475.8
  Top Layer w10: v1@397.35,1384.92 418.45,1406.02 U51.18@469.49,1406.02 473.46,1410 530,1410 535,1415 v1(535,1560) 534.57,1559.57 U51.12@469.49,1559.57
  Bottom Layer w20: C95.2@315,1384.92 C91.2@360,1384.92 389.92,1384.92 v1(390,1385) ; C87.2@495,1560 v1(535,1560)
NetC88_2: C88.2 C92.2 C96.2 U52.12 U52.18 | length 475.9
  Top Layer w10: v1@397.35,1704.92 418.45,1726.02 U52.18@469.49,1726.02 473.46,1730 530,1730 535,1735 v1(535,1880) 534.57,1879.57 U52.12@469.49,1879.57
  Bottom Layer w20: C96.2@315,1705 359.92,1705 C92.2@360,1704.92 389.92,1704.92 v1(390,1705) ; C88.2@495,1880 v1(535,1880)
NetC97_2: C97.2 C101.2 C109.2 U69.3 U69.9 | length 470.3
  Top Layer w10: U69.9@780.51,2199.57 719.57,2199.57 715,2195 715,2055 720,2050 780.51,2050 780.51,2046.02 831.55,2046.02 v1@852.65,2024.92
  Bottom Layer w20: v1(715,2199) 715.92,2199.92 C109.2@755,2199.92 ; v1(860,2025) 860.08,2024.92 C101.2@885,2024.92 C97.2@930,2024.92
NetC98_2: C98.2 C102.2 C110.2 U70.3 U70.9 | length 470.3
  Top Layer w10: U70.9@780.51,2519.57 719.57,2519.57 715,2515 715,2375 720,2370 780.51,2370 U70.3@780.51,2366.02 831.55,2366.02 v1@852.65,2344.92
  Bottom Layer w20: v1(715,2519) 715.92,2519.92 C110.2@755,2519.92 ; v1(860,2345) 860.08,2344.92 C102.2@885,2344.92 885.08,2345 C98.2@930,2345
NetC99_2: C99.2 C103.2 C111.2 U71.3 U71.9 | length 470.3
  Top Layer w10: U71.9@780.51,2839.57 719.57,2839.57 715,2835 715,2695 720,2690 780.51,2690 U71.3@780.51,2686.02 831.55,2686.02 v1@852.65,2664.92
  Bottom Layer w20: v1(715,2839) 716,2840 C111.2@755,2840 ; v1(860,2665) 860.08,2664.92 C103.2@885,2664.92 C99.2@930,2664.92
NetC100_2: C100.2 C104.2 C112.2 U72.3 U72.9 | length 467.7
  Top Layer w10: U72.9@780.51,3159.57 719.57,3159.57 715,3155 715,3015 720,3010 780.51,3010 U72.3@780.51,3006.02 828.98,3006.02 v1@850.08,2984.92
  Bottom Layer w15: v1(715,3159) 715.92,3159.92 C112.2@755,3159.92
  Bottom Layer w20: v1(860,2985) 860.08,2984.92 C104.2@885,2984.92 C100.2@930,2984.92
NetC117_2: C117.2 C121.2 C125.2 U69.12 U69.18 | length 473.3
  Top Layer w10: v1@399.92,2024.92 421.02,2046.02 469.49,2046.02 473.46,2050 530,2050 535,2055 v1(535,2200) 534.57,2199.57 U69.12@469.49,2199.57
  Bottom Layer w15: C117.2@495,2199.92 534.92,2199.92 v1(535,2200)
  Bottom Layer w20: C125.2@315,2024.92 C121.2@360,2024.92 389.92,2024.92 v1(390,2025)
NetC118_2: C118.2 C122.2 C126.2 U70.12 U70.18 | length 473.3
  Top Layer w10: v1@399.92,2344.92 421.02,2366.02 U70.18@469.49,2366.02 473.46,2370 530,2370 535,2375 v1(535,2520) 534.57,2519.57 U70.12@469.49,2519.57
  Bottom Layer w15: C118.2@495,2520 v1(535,2520)
  Bottom Layer w20: C126.2@315,2345 359.92,2345 C122.2@360,2344.92 389.92,2344.92 v1(390,2345)
NetC119_2: C119.2 C123.2 C127.2 U71.12 U71.18 | length 473.3
  Top Layer w10: v1@399.92,2664.92 421.02,2686.02 U71.18@469.49,2686.02 473.46,2690 530,2690 535,2695 v1(535,2840) 534.57,2839.57 U71.12@469.49,2839.57
  Bottom Layer w15: C119.2@495,2839.84 534.84,2839.84 v1(535,2840)
  Bottom Layer w20: C127.2@315,2664.92 C123.2@360,2664.92 389.92,2664.92 v1(390,2665)
NetC120_2: C120.2 C124.2 C128.2 U72.12 U72.18 | length 473.3
  Top Layer w10: v1@399.92,2984.92 421.02,3006.02 U72.18@469.49,3006.02 473.46,3010 530,3010 535,3015 v1(535,3160) 534.57,3159.57 U72.12@469.49,3159.57
  Bottom Layer w15: C120.2@495,3159.92 534.92,3159.92 v1(535,3160)
  Bottom Layer w20: C128.2@315,2984.92 C124.2@360,2984.92 389.92,2984.92 v1(390,2985)
NetC135_2: C135.2 C139.2 R70.2 U87.3 U89.4 | length 480
  Top Layer w15: R70.2@2399.92,4620 R70.2@2399.84,4619.92 ; R70.2@2399.84,4619.92 2385,4619.92 2370.16,4619.92 2385,4605.08 R70.2@2399.84,4619.92
  Top Layer w20: C139.2@2350,4619.92 2370.16,4619.92 ; U89.4@2385,4542 2385,4605.08 ; 2385,4619.92 2400,4634.92 2400,4777 U87.3@2445,4822
  Bottom Layer w20: C135.2@2444.96,4920 U87.3@2445,4822 U87.3@2445,4822
NetC136_2: C136.2 C140.2 R71.2 U88.3 U90.4 | length 697.5
  Top Layer w10: R71.2@94.84,4609.92 R71.2@94.92,4610
  Top Layer w20: C140.2@45,4609.92 55.16,4609.92 ; U90.4@75,4532 75,4590.08 ; U88.3@160,5008 160,4710 75,4625 75,4609.92 ; 55.16,4609.92 75,4590.08 ; 55.16,4609.92 75,4609.92 ; 75,4590.08 94.84,4609.92 75,4609.92
  Bottom Layer w20: C136.2@155,4910 155,5003 U88.3@160,5008
NetC137_2: C137.2 U89.2 | length 84.2
  Top Layer w15: U89.2@2485,4542 2485,4595 2499.92,4609.92 C137.2@2499.92,4620
NetC138_2: C138.2 U90.2 | length 84.2
  Top Layer w15: U90.2@175,4532 175,4595.08 C138.2@189.92,4610
NetC143_2: C143.2 U89.5 U91.1 U91.2 | length 1275.3
  Top Layer w20: U91.1@2199.14,3354.97 2199.14,3429.14 v1(2215,3445) v1(2245,3445) 2266.07,3423.93 U91.2@2266.07,3354.97 ; v1(2385,4265) v1(2385,4295) U89.5@2385,4348
  Bottom Layer w20: v1(2215,3445) 2227.52,3457.52 2227.52,3462.48 ; v1(2245,3445) 2227.52,3462.48 ; v1(2385,4265) 2385,4235 2165,4015 2165,3565 2227.52,3502.48 C143.2@2227.52,3495 2227.52,3462.48
NetC144_2: C144.2 U90.5 U92.1 U92.2 | length 1181.5
  Top Layer w20: v1(75,4255) v1(75,4285) U90.5@75,4338 ; U92.1@139.14,3354.97 139.14,3429.14 v1(155,3445) v1(185,3445) 206.07,3423.93 U92.2@206.07,3354.97
  Bottom Layer w20: v1(75,4255) 100,4230 100,3570 142.52,3527.48 C144.2@142.52,3495 142.52,3457.48 v1(155,3445) v1(185,3445)
NetC151_2: C151.2 C155.2 R80.2 U93.3 U94.6 U97.4 | length 723.2
  Top Layer w15: R80.2@1500,4155 1500,4160 1545.16,4205.16 C155.2@1545.16,4210
  Top Layer w20: C155.2@1545.16,4210 U97.4@1610,4210 ; U97.4@1610,4197 U97.4@1610,4210 ; U94.6@1725,4380 1610,4265 U97.4@1610,4210
  Bottom Layer w20: U94.6@1725,4380 1785,4440 1870,4440 1910,4480 U93.3@1910,4500 1910,4547.48 C151.2@1867.48,4590
NetC152_2: C152.2 C156.2 R81.2 U95.3 U96.6 U98.4 | length 940.7
  Top Layer w15: R81.2@884.92,4155 884.92,4164.92 925.08,4205.08 C156.2@925.08,4210
  Top Layer w20: U96.6@885,4520 825,4460 730,4460 701.26,4431.26 U95.3@701.26,4400 701.26,4353.74 770,4285 950,4285 995,4240 U98.4@995,4210 ; C156.2@925.08,4210 U98.4@995,4210 ; U98.4@995,4197 U98.4@995,4210
  Bottom Layer w20: U95.3@701.26,4400 701.26,4358.78 C152.2@755.04,4305
NetC153_2: C153.2 U97.2 | length 105
  Top Layer w20: U97.2@1710,4197 v1(1710,4255)
  Bottom Layer w20: v1(1710,4255) 1710,4214.92 C153.2@1714.92,4210
NetC154_2: C154.2 U98.2 | length 105
  Top Layer w20: U98.2@1095,4197 v1(1095,4255)
  Bottom Layer w20: v1(1095,4255) 1095,4214.92 C154.2@1099.92,4210
NetC157_2: C157.2 C159.2 U97.5 U99.2 U101.1 U101.3 | length 1409.3
  Top Layer w20: U101.3@1307.6,3792.24 1307.6,3762.4 1325,3745 1370,3745 1382.4,3757.4 U101.1@1382.4,3792.24 1385.08,3794.92 C159.2@1385.08,3855 1385.08,3965.08 1423,4003 v1@1592,4003 ; v1(1570,3460) 1585,3445 v1(1590,3445) 1603.07,3431.93 U99.2@1603.07,3354.97 ; v1(1585,3980) 1587,3980 U97.5@1610,4003 v1@1592,4003 ; v1(1585,4010) v1@1592,4003
  Bottom Layer w20: v1(1585,4010) v1(1585,3980) 1530,3980 1495,3945 1495,3565 1557.52,3502.48 C157.2@1557.52,3495 1557.52,3472.48 v1(1570,3460) 1585,3445 v1(1590,3445)
NetC158_2: C158.2 U98.5 U100.1 U100.2 | length 1107.6
  Top Layer w20: U100.1@807.28,3354.97 807.28,3422.28 v1(830,3445) v1(860,3445) 874.21,3430.79 U100.2@874.21,3354.97 ; v1(970,3980) U98.5@993,4003 ; v1(970,4010) 977,4003 U98.5@993,4003 ; U98.5@995,4003 U98.5@993,4003
  Bottom Layer w20: v1(860,3445) v1(830,3445) 827.52,3447.48 C158.2@827.52,3495 765,3557.52 765,3950 825,4010 v1(970,4010) v1(970,3980)
NetC160_2: C160.2 U101.4 | length 68.8
  Top Layer w20: C160.2@1240,3694.92 1304.76,3694.92 U101.4@1307.6,3697.76
NetCN19_1: CN19.1 U84.2 | length 668.5
  Top Layer w10: U84.2@2103.11,280 2230,280 2285,335 2285,615 CN19.1@2415,745
NetCN22_1: CN22.1 D1.2 | length 111.2
  Top Layer w20: CN22.1@830,5035 845,5020 D1.2@935,5020
NetR67_2: R67.2 R88.1 U83.10 U84.6 U99.1 | length 4537.6
  Top Layer w10: U83.10@825.79,195 v1@920,195 ; R67.2@925,140.08 925,190 v1@920,195 ; v1(945,180) 930,195 v1(925,195) v1@920,195 ; R88.1@1450,3299.92 1481.09,3299.92 U99.1@1536.14,3354.97 v1(1536.14,3265) v1(1536.14,3240) ; v1(1715,330) v1(1740,330) U84.6@1866.89,330
  Bottom Layer w10: v1(925,195) 930,195 v1(945,180) 1050,75 1460,75 v1(1715,330) ; v1(1536.14,3265) v1(1536.14,3240) 1536.14,3107 1622,3021.14 1622,423 v1(1715,330) ; v1(1740,330) v1(1715,330)
NetR70_1: R70.1 R72.2 U89.3 | length 218.2
  Top Layer w10: v1(2400,4465) 2420,4465 2435,4480 U89.3@2435,4542 2435,4595 2440.08,4600.08 R70.1@2440.08,4620
  Bottom Layer w10: v1(2400,4465) R72.2@2434.92,4465
NetR71_1: R71.1 R73.2 U90.3 | length 216.1
  Top Layer w10: v1(95,4460) 120,4460 125,4465 U90.3@125,4532 125,4580 135.08,4590.08 R71.1@135.08,4610
  Bottom Layer w10: v1(95,4460) R73.2@129.84,4460
NetR72_1: R72.1 R74.2 U89.8 | length 153.5
  Top Layer w10: U89.8@2535,4348 v1(2535,4400)
  Bottom Layer w10: R72.1@2475.08,4465 2475.08,4454.92 2505.08,4424.92 R74.2@2525,4424.92 2525,4410 v1(2535,4400)
NetR73_1: R73.1 R75.2 U90.8 | length 164.8
  Top Layer w10: U90.8@225,4338 225,4380 v1(235,4390)
  Bottom Layer w10: R73.1@170,4460 170,4450 200,4420 R75.2@220,4420 220,4405 v1(235,4390)
NetR76_2: R76.2 U89.7 | length 72.9
  Top Layer w10: R76.2@2485,4275.08 U89.7@2485,4348
NetR77_2: R77.2 U90.7 | length 77.9
  Top Layer w10: R77.2@175,4260.08 U90.7@175,4338
NetR80_1: R80.1 R82.2 U97.3 | length 231.6
  Top Layer w10: R80.1@1540.16,4155 1570.16,4125 v1(1620,4125) 1640,4125 1660,4145 U97.3@1660,4197
  Bottom Layer w10: v1(1620,4125) 1644.92,4125 R82.2@1654.92,4135
NetR81_1: R81.1 R83.2 U98.3 | length 241.7
  Top Layer w10: R81.1@925.08,4155 925.08,4154.92 960,4120 v1(1010,4120) 1030,4120 1045,4135 U98.3@1045,4197
  Bottom Layer w10: v1(1010,4120) 1034.92,4120 R83.2@1044.92,4130
NetR82_1: R82.1 R84.2 U97.8 | length 179.3
  Top Layer w10: U97.8@1760,4003 v1(1760,4060)
  Bottom Layer w10: R82.1@1695.08,4135 1695.08,4114.92 1715.08,4094.92 R84.2@1750,4094.92 1760,4084.92 v1(1760,4060)
NetR83_1: R83.1 R85.2 U98.8 | length 177.6
  Top Layer w10: U98.8@1145,4003 1145,4045 v1(1155,4055)
  Bottom Layer w10: R83.1@1085.08,4130 1085.08,4104.92 1110.08,4079.92 R85.2@1140,4079.92 1155,4064.92 v1(1155,4055)
NetR86_2: R86.2 U97.7 | length 232.3
  Top Layer w10: R86.2@1540.08,4080 1685,4080 1710,4055 U97.7@1710,4003
NetR87_2: R87.2 U98.7 | length 234.3
  Top Layer w10: R87.2@925.08,4085 935.08,4075 1075,4075 1095,4055 U98.7@1095,4003
RX1_ISO_N: CN9.2 R33.1 U41.2 U49.6 | length 386.1
  Top Layer w10: U49.6@780.51,842.8 832.76,842.8 836.55,839 872.71,839 876.83,834.88 903.17,834.88 905.65,837.35 922.43,837.35 930.16,845.08 R33.1@945,845.08 959.84,845.08 970.92,834 1007.46,834 1040,801.46 1061.46,801.46 CN9.2@1075,815
  Bottom Layer w10: CN9.2@1075,815 1090.31,799.69 1109.41,799.69 1113.5,803.78 U41.2@1127.36,803.78
RX1_ISO_P: CN9.1 R33.2 U41.1 U49.5 | length 394.4
  Top Layer w10: U49.5@780.51,817.2 832.76,817.2 836.55,821 850,821 851,820 866.25,820 869.37,816.88 918.2,816.88 930.16,804.92 R33.2@945,804.92 959.84,804.92 970.92,816 1000,816 1036,780 1060,780 CN9.1@1075,765 CN9.1@1070.04,765
  Bottom Layer w10: CN9.1@1075,765 1090.32,780.32 1104.32,780.32 1105,781 1108.72,781 1113.5,776.22 U41.1@1127.36,776.22
RX1_N: CN11.2 R41.1 U49.15 U53.1 | length 425.2
  Top Layer w10: CN11.2@175,815 190.31,799.69 208.31,799.69 210,798 281.54,798 322.54,839 334.08,839 345.16,850.08 R41.1@360,850.08 374.84,850.08 385.92,839 413.45,839 417.24,842.8 U49.15@469.49,842.8
  Bottom Layer w10: U53.1@87.64,803.78 101.5,803.78 106.28,799 115,799 115.69,799.69 159.69,799.69 CN11.2@175,815
RX1_P: CN11.1 R41.2 U49.16 U53.2 | length 424.4
  Top Layer w10: CN11.1@175,765 190,780 289,780 330,821 334.08,821 345.16,809.92 R41.2@360,809.92 374.84,809.92 385.92,821 413.45,821 417.24,817.2 U49.16@469.49,817.2
  Bottom Layer w10: U53.2@87.64,776.22 101.5,776.22 106.28,781 115,781 115.68,780.32 159.68,780.32 CN11.1@175,765
RX2_ISO_N: CN9.4 R34.1 U42.2 U49.8 | length 383
  Top Layer w10: U49.8@781.61,895.08 U49.8@780.51,893.98 832.76,893.98 836.55,890.18 865.26,890.18 875.16,900.08 R34.1@890,900.08 904.84,900.08 915.92,889 1044.04,889 1060.04,905 1065,905 CN9.4@1075,915 CN9.4@1070.04,915
  Bottom Layer w10: CN9.4@1075,915 1090.32,899.68 1104.32,899.68 1105,899 1108.72,899 1113.5,903.78 U42.2@1127.36,903.78
RX2_ISO_P: CN9.3 R34.2 U42.1 U49.7 | length 386.5
  Top Layer w10: U49.7@780.51,868.39 832.76,868.39 836.55,872.18 862.9,872.18 875.16,859.92 R34.2@890,859.92 904.84,859.92 915.92,871 1064.04,871 1070.04,865 CN9.3@1075,865 CN9.3@1062.73,877.27
  Bottom Layer w10: CN9.3@1075,865 1090.32,880.32 1104.32,880.32 1105,881 1108.72,881 1113.5,876.22 U42.1@1127.36,876.22
RX2_N: CN11.4 R42.1 U49.13 U54.1 | length 411.5
  Top Layer w10: CN11.4@175,915 179.96,915 205.96,889 279.08,889 290.16,900.08 R42.1@305,900.08 319.84,900.08 326.8,893.12 380.63,893.12 383.57,890.18 413.45,890.18 417.24,893.98 U49.13@469.49,893.98
  Bottom Layer w10: U54.1@87.64,903.78 101.5,903.78 106.28,899 110,899 110.68,899.68 159.68,899.68 CN11.4@175,915
RX2_P: CN11.3 R42.2 U49.14 U54.2 | length 406.6
  Top Layer w10: CN11.3@175,865 181,871 279.08,871 290.16,859.92 R42.2@305,859.92 319.84,859.92 335.04,875.12 373.17,875.12 376.11,872.18 413.45,872.18 417.24,868.39 U49.14@469.49,868.39
  Bottom Layer w10: U54.2@87.64,876.22 101.5,876.22 106.28,881 110,881 110.68,880.32 159.68,880.32 CN11.3@175,865
RX3_ISO_N: CN9.8 R35.1 U43.2 U50.6 | length 399.2
  Top Layer w10: U50.6@780.51,1162.8 832.76,1162.8 836.55,1159 872.71,1159 876.83,1154.88 914.88,1154.88 930.16,1170.16 R35.1@945,1170.16 959.84,1170.16 970.92,1159.08 982.46,1159.08 1043.53,1098 1045,1098 1046.68,1099.68 1059.68,1099.68 CN9.8@1075,1115
  Bottom Layer w10: CN9.8@1077.18,1108.43 1085.62,1100 1099,1100 1105,1094 1108.72,1094 1113.5,1098.78 U43.2@1127.36,1098.78
RX3_ISO_P: CN9.7 R35.2 U43.1 U50.5 | length 403.1
  Top Layer w10: U50.5@780.51,1137.2 832.76,1137.2 836.55,1141 865.25,1141 869.37,1136.88 922.34,1136.88 922.81,1137.35 930.16,1130 R35.2@945,1130 959.84,1130 970.92,1141.08 975,1141.08 1036.08,1080 1060,1080 CN9.7@1075,1065 CN9.7@1070.04,1065
  Bottom Layer w10: CN9.7@1075,1065 1088.54,1078.54 1095,1078.54 1097.54,1076 1108.72,1076 1113.5,1071.22 U43.1@1127.36,1071.22
RX3_N: CN11.8 R43.1 U50.15 U55.1 | length 433.9
  Top Layer w10: CN11.8@175,1115 190,1100 244.54,1100 299.43,1154.88 318.17,1154.88 322.29,1159 334.08,1159 345.16,1170.08 R43.1@360,1170.08 374.84,1170.08 385.92,1159 413.45,1159 417.24,1162.8 U50.15@469.49,1162.8
  Bottom Layer w10: U55.1@87.64,1098.78 101.5,1098.78 106.28,1094 140,1094 145.68,1099.68 159.68,1099.68 CN11.8@175,1115
RX3_P: CN11.7 R43.2 U50.16 U55.2 | length 430.6
  Top Layer w10: CN11.7@175,1065 190.32,1080.32 203.32,1080.32 205,1082 252,1082 306.88,1136.88 325.63,1136.88 329.75,1141 334.08,1141 345.16,1129.92 R43.2@360,1129.92 374.84,1129.92 385.92,1141 413.45,1141 417.24,1137.2 U50.16@469.49,1137.2
  Bottom Layer w10: U55.2@87.64,1071.22 101.5,1071.22 106.28,1076 164,1076 CN11.7@175,1065
RX4_ISO_N: CN9.10 R36.1 U44.2 U50.8 | length 376.9
  Top Layer w10: U50.8@780.51,1213.98 832.76,1213.98 836.55,1210.18 865.26,1210.18 875.16,1220.08 R36.1@890,1220.08 904.84,1220.08 915.92,1209 920.17,1209 924.37,1213.2 1032.26,1213.2 1042.73,1202.73 1062.73,1202.73 CN9.10@1075,1215
  Bottom Layer w10: CN9.10@1075,1215 1090.32,1199.68 1104.32,1199.68 1105,1199 1108.72,1199 1113.5,1203.78 U44.2@1127.36,1203.78
RX4_ISO_P: CN9.9 R36.2 U44.1 U50.7 | length 380.9
  Top Layer w10: U50.7@780.51,1188.39 832.76,1188.39 836.55,1192.18 862.9,1192.18 875.16,1179.92 R36.2@890,1179.92 904.84,1179.92 915.92,1191 927.63,1191 931.83,1195.2 1024.8,1195.2 1055,1165 CN9.9@1075,1165
  Bottom Layer w10: CN9.9@1075,1165 1090.32,1180.32 1104.32,1180.32 1105,1181 1108.72,1181 1113.5,1176.22 U44.1@1127.36,1176.22
RX4_N: CN11.10 R44.1 U50.13 U56.1 | length 412.7
  Top Layer w10: CN11.10@175,1215 187.27,1202.73 187.27,1199.68 189.23,1199.68 198.54,1209 279.08,1209 290.16,1220.08 R44.1@305,1220.08 319.84,1220.08 326.8,1213.12 380.63,1213.12 383.57,1210.18 413.45,1210.18 417.24,1213.98 U50.13@469.49,1213.98
  Bottom Layer w10: U56.1@87.64,1203.78 101.5,1203.78 106.28,1199 110,1199 110.68,1199.68 159.68,1199.68 CN11.10@175,1215
RX4_P: CN11.9 R44.2 U50.14 U56.2 | length 414.9
  Top Layer w10: CN11.9@175,1165 180,1165 206,1191 279.08,1191 290.16,1179.92 R44.2@305,1179.92 319.84,1179.92 335.04,1195.12 373.17,1195.12 376.11,1192.18 413.45,1192.18 417.24,1188.39 U50.14@469.49,1188.39
  Bottom Layer w10: U56.2@87.64,1176.22 101.5,1176.22 106.28,1181 110,1181 110.68,1180.32 159.68,1180.32 CN11.9@175,1165
RX5_ISO_N: CN10.2 R37.1 U45.2 U51.6 | length 400
  Top Layer w10: U51.6@780.51,1482.8 832.76,1482.8 836.55,1479 872.71,1479 876.83,1474.88 914.96,1474.88 930.16,1490.08 R37.1@945,1490.08 959.84,1490.08 970.92,1479 978.38,1479 1037.69,1419.69 1059.69,1419.69 CN10.2@1075,1435
  Bottom Layer w10: CN10.2@1075,1435 1090.31,1419.69 1109.41,1419.69 1113.5,1423.78 U45.2@1127.36,1423.78
RX5_ISO_P: CN10.1 R37.2 U45.1 U51.5 | length 402.6
  Top Layer w10: U51.5@780.51,1457.2 832.76,1457.2 836.55,1461 865.25,1461 869.37,1456.88 923.2,1456.88 930.16,1449.92 R37.2@945,1449.92 959.84,1449.92 970.92,1461 1031.92,1400 1060,1400 CN10.1@1075,1385 CN10.1@1070.04,1385
  Bottom Layer w10: CN10.1@1075,1385 1090.32,1400.32 1104.32,1400.32 1105,1401 1108.72,1401 1113.5,1396.22 U45.1@1127.36,1396.22
RX5_N: CN12.2 R45.1 U51.15 U57.1 | length 433.5
  Top Layer w10: CN12.2@175,1435 190.31,1419.69 218.31,1419.69 220,1418 261.54,1418 322.54,1479 334.08,1479 345.16,1490.08 R45.1@360,1490.08 374.84,1490.08 385.92,1479 413.45,1479 417.24,1482.8 U51.15@469.49,1482.8
  Bottom Layer w10: U57.1@87.64,1423.78 101.5,1423.78 106.28,1419 110,1419 110.69,1419.69 159.69,1419.69 CN12.2@175,1435
RX5_P: CN12.1 R45.2 U51.16 U57.2 | length 432.7
  Top Layer w10: CN12.1@175,1385 190,1400 269,1400 330,1461 334.08,1461 345.16,1449.92 R45.2@360,1449.92 374.84,1449.92 385.92,1461 413.45,1461 417.24,1457.2 U51.16@469.49,1457.2
  Bottom Layer w10: U57.2@87.64,1396.22 101.5,1396.22 106.28,1401 110,1401 110.68,1400.32 159.68,1400.32 CN12.1@175,1385
RX6_ISO_N: CN10.4 R38.1 U46.2 U51.8 | length 380.7
  Top Layer w10: U51.8@780.51,1533.98 832.76,1533.98 836.55,1530.18 865.26,1530.18 875.16,1540.08 R38.1@890,1540.08 904.84,1540.08 915.92,1529 920.25,1529 924.37,1533.12 970.54,1533.12 985.66,1518 1040,1518 1041.68,1519.68 1059.68,1519.68 CN10.4@1075,1535
  Bottom Layer w10: CN10.4@1075,1535 1090.32,1519.68 1104.32,1519.68 1105,1519 1108.72,1519 1113.5,1523.78 U46.2@1127.36,1523.78